# Altium PCB MODULIQ_UART.PcbDoc (part 2 of 2)
Units mm, origin at the board's own origin, x right, y up, seen from the top; angles counter-clockwise.
Board outline 24 x 76.5 mm, 4 copper layers (L1, P2, L3, L4), stack 1.512 mm thick; 76 components, 87 nets, 302 pads, 180 vias.
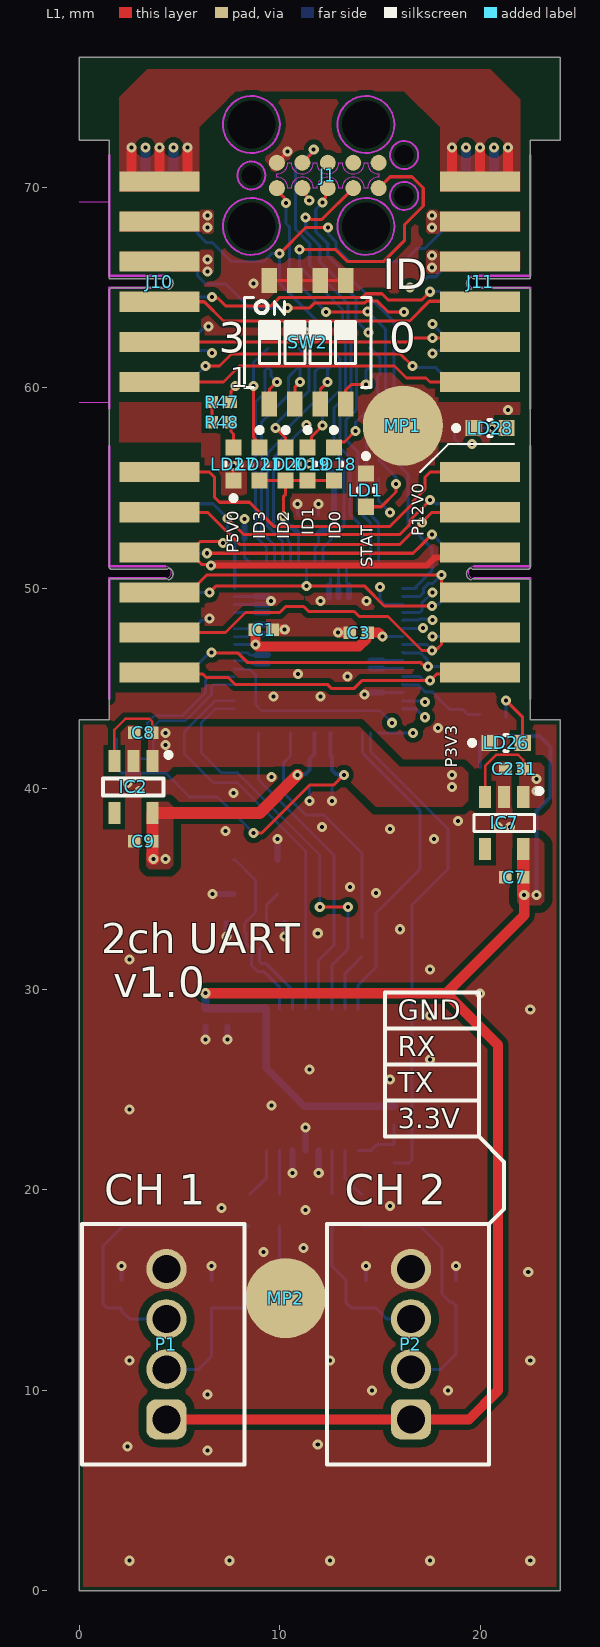
[diagram p0: L1 view]

## Via types
v1: diameter 0.5, hole 0.2, L1 to L4, tented both sides, 179 vias
v2: diameter 0.5, hole 0.2, L1 to L4, 1 vias

## Nets (pads, with @x,y where several pads share a name; then routed paths per layer and width w, separated by ;. In a path a pad name is that pad's centre, name@x,y a point inside that pad or via, vN(x,y) a via of type N, cw(c..) or ccw(c..) an arc to the next point about the centre after c; other vN are vias at no path point) (continued)
TDO: (continued)
  L1 w0.152: v1(12.145,69.246) 12.145,69.34 12.276,69.472 12.276,69.841 J1.3
  L4 w0.152: v1(12.145,69.246) 11.8,68.901 11.8,67.8 12.4,67.2 12.4,66.6 15.7,63.3 15.7,56.4 16.4,55.7 16.4,53.2 17.593,52.007 17.593,50.881 16.814,50.102 16.814,50.024 16.79,50 IC1.17
TMS: IC1.14 J1.5 | length 29.1
  L1 w0.152: v1(11,66.9) 12.8,66.9 13.4,66.3 15.169,66.3 16.219,67.35 16.219,68.13 17.163,69.075 17.163,69.979 16.605,70.537 15.512,70.537 J1.5
  L4 w0.152: v1(11,66.9) 11,66.043 13.133,63.91 13.133,63.076 13.563,62.646 13.563,60.415 13.562,60.414 13.562,59.362 13,58.8 13,57.033 13.5,56.533 13.5,53.7 14.14,53.06 IC1.14
TRG: J4.7 J9.7 | length 19.2
  L1 w0.152: J9.7 6.5,55.8 6.75,55.55 6.75,54.55 7,54.3 8.5,54.3 9.7,53.1 15.5,53.1 16.65,54.25 16.65,54.35 17.25,54.95 17.25,55.55 17.5,55.8 J4.7
UART1_RX: D2.1 P1.3 R8.2 | length 14.1
  L4 w0.15: P1.3 4.345,13.555 2.52,13.555 2.1,13.975 D2.1 1.4,14.1 1.2,14.3 1.2,17.2 2.2,18.2 R8.2
UART1_RX_R: IC3.16 R8.1 | length 2.6
  L4 w0.15: R8.1 8.55,19.8 9,20.25 9.349,20.599 IC3.16
UART1_TX: D3.1 P1.2 R7.2 | length 11.7
  L4 w0.15: P1.2 5.95,11.05 6.6,11.7 D3.1 8.8,14.1 10,15.3 R7.2
UART1_TX_R: IC3.15 R7.1 | length 2.2
  L4 w0.15: R7.1 IC3.15
UART2_RX: D4.1 P2.3 R10.2 | length 7.7
  L4 w0.15: R10.2 12.6,16.2 13.3,15.5 13.3,14.4 13.6,14.1 D4.1 14.8,14.1 15.345,13.555 16.545,13.555 P2.3
UART2_RX_R: IC3.11 R10.1 | length 2.2
  L4 w0.15: R10.1 IC3.11
UART2_TX: D5.1 P2.2 R9.2 | length 12.7
  L4 w0.15: R9.2 17,18.2 18.1,17.1 18.1,14.8 18.5,14.4 18.625,14.4 18.8,14.225 D5.1 18.8,11.8 18.05,11.05 P2.2
UART2_TX_R: IC3.10 R9.1 | length 2.6
  L4 w0.15: IC3.10 13.249,20.601 14.05,19.8 R9.1
pads on no net: IC1.FTG1 IC1.FTG2 IC2.4 IC7.4 J1.6 J1.7 J1.8 J1.Mech

## Polygon pours and split planes (outlines as drawn)
GND on L3 "GND_L03_P028" (solid, remove dead copper, pour order 28): 22.5,60.3 22.5,60.8 22.5,70.3 24,70.3 24,73.4 24,76.5 0,76.5 0,73.4 0,70.3 1.5,70.3 1.5,60.8 1.5,60.3 1.5,55.8 1.5,43.2 0.2,43.2 0.2,0.2 23.8,0.2 23.8,43.2 22.5,43.2 22.5,55.8
P12V0 on L3 "P12V0_L03_P019" (solid, pour order 19): 6.32,66.88 5.9,67.3 5.9,70.8 6.6,71.5 7.3,72.2 16.7,72.2 17.4,71.5 18.2,70.7 18.2,67.7 17.3,66.8 17.3,65.8 17.4,65.7 17.9,65.7 18,65.8 20.6,65.8 21.9,67.1 21.9,74.5 20.2,76.2 3.7,76.2 2.1,74.6 2.1,67.1 3.4,65.8 5,65.8 5.3,65.5 6.6,65.5 6.723,65.623 6.723,66.477
GND on L4 "GND_L04_P029" (solid, remove dead copper, pour order 29): 0.245,72.4 2,72.4 2,69.8 6.1,69.8 6.1,59.2 1.971,59.2 1.971,55.3 6.1,55.3 6.1,43.1 0.245,43.1 0.245,0.1 23.845,0.1 23.845,43.1 18.045,43.1 18.045,55.3 22.045,55.3 22.045,59.2 17.871,59.2 17.871,69.8 22,69.8 22,72.4 23.845,72.4 23.845,73.95 23.845,76.2 0.245,76.2
P5V0 on L4 "P5V0_L04_P027" (solid, pour order 27): 19.2,42.1 19.5,41.8 19.5,40.5 19.6,40.4 20.4,40.4 20.6,40.6 20.6,41.6 20.9,41.9 23,41.9 23.2,41.7 23.2,39.9 22.9,39.6 18.8,39.6 18.1,40.3 18.1,41.8 18.4,42.1
GND on L1 "GND_L01_P030" (solid, remove dead copper, pour order 30): 6.1,44.8 1.521,44.8 1.521,43.2 0.2,43.2 0.2,0.2 23.8,0.2 23.8,43.2 22.5,43.2 22.5,44.8 17.9,44.8 17.9,57.3 22,57.3 22,59.3 17.9,59.3 17.9,72.4 24,72.4 24,73.4 24,76.5 0,76.5 0,73.4 0,72.3 6.1,72.3 6.1,59.3 2,59.3 2,57.3 6.1,57.3
P1V8 on L1 "P1V8_L01_P026" (solid, pour order 26): 3.35,39.35 3.35,36.15 3.5,36 4.5,36 4.7,36.2 4.7,39.1 4.45,39.35
P3V3 on L1 "P3V3_L01_P025" (solid, pour order 25): 21.85,37.55 21.85,34.35 22,34.2 23,34.2 23.2,34.4 23.2,37.3 22.95,37.55
P5V0 on L1 "P5V0_L01_P022" (solid, pour order 22): 22,68.8 17.9,68.8 17.8,68.9 17.4,68.9 17.3,68.8 17.3,67.8 17.4,67.7 17.9,67.7 18,67.8 22,67.8
P5V0 on L1 "P5V0_L01_P021" (solid, pour order 21): 2,67.8 6.1,67.8 6.2,67.7 6.6,67.7 6.7,67.8 6.7,68.8 6.6,68.9 6.1,68.9 6,68.8 2,68.8
P12V0 on L1 "P12V0_L01_P020" (solid, pour order 20): 2,69.8 2,74.5 3.4,75.9 20.5,75.9 22,74.4 22,69.8 18,69.8 18,73 16.2,74.8 7.8,74.8 6,73 6,69.8
P12V0 on L1 "P12V0_L01_P018" (solid, pour order 18): 22,66.8 17.9,66.8 17.8,66.9 17.4,66.9 17.3,66.8 17.3,65.8 17.4,65.7 17.9,65.7 18,65.8 22,65.8
P12V0 on L1 "P12V0_L01_P017" (solid, pour order 17): 2,65.8 6.1,65.8 6.2,65.7 6.6,65.7 6.7,65.8 6.7,66.8 6.6,66.9 6.1,66.9 6,66.8 2,66.8
P5V0 on L1 "P5V0_L01_P015" (solid, pour order 15): 4.7,41.1 12.8,41.1 14.8,39.1 19.1,39.1 19.4,39.4 19.4,40.8 19.1,41.1 16,41.1 13.99,43.11 9.69,43.11 3.34,43.11 3.34,40.86 3.35,40.85 4.45,40.85
P5V0 on L1 "P5V0_L01_P014" (solid, pour order 14): 21.85,39.05 21.84,39.06 21.84,41.31 22.99,41.31 23.2,41.1 23.2,39.3 22.95,39.05
GND on L1 "GND_L01_P013" (solid, pour order 13): 21.56,35.29 21.7,35.43 21.7,37.9 21.8,38 21.8,38.8 21.56,39.04 21.56,41.31 20.94,41.31 20.9,41.27 20.9,39.05 20.6,38.75 20.6,37.9 20.8,37.7 20.8,35.43 20.94,35.29
GND on L1 "GND_L01_P012" (solid, pour order 12): 3.06,37.09 3.2,37.23 3.2,39.7 3.3,39.8 3.3,40.6 3.06,40.84 3.06,43.11 2.44,43.11 2.4,43.07 2.4,40.85 2.1,40.55 2.1,39.7 2.3,39.5 2.3,37.23 2.44,37.09
GND on P2 (split plane): 317 vertices, not listed, extent 0.602,0.602 23.398,75.898

## Keep-outs
KeepOutLayer:
  circle w0.1: c8.59,70.6 r0.7
  circle w0.1: c16.21,69.584 r0.7
  circle w0.1: c16.21,71.616 r0.7
  circle w0.1: c14.305,68.06 r1.421
  circle w0.1: c8.59,68.06 r1.421
  circle w0.1: c14.305,73.14 r1.421
  circle w0.1: c8.59,73.14 r1.421
  lines w0.05: 0,59.3 1.503,59.3 1.503,65 ; 0.9,69.3 0,69.3 ; 1.5,65.6 1.5,68.4 ; 1.5,69.3 0,69.3 ; 0,69.3 0,69.3

## Other copper
L4:
  pour cut-out: 12.363,37.861 12.363,31.376 10.987,30 7,30 6,31 6,37.5 7,38.5 11.724,38.5

## Silkscreen, mask and mechanical layers (free items; w line width, h text height)
TopOverlay:
  lines w0.1: 17,55.8 18.4,57.2 21.7,57.2
  lines w0.2: 18.45,22.65 19.95,22.65 ; 18.45,24.45 19.95,24.45 ; 18.45,26.25 19.95,26.25 ; 18.45,28.05 19.95,28.05 ; 18.45,29.85 19.95,29.85 19.95,28.05 ; 18.75,22.65 15.25,22.65 15.25,24.45 ; 18.75,24.45 15.25,24.45 ; 18.75,26.25 15.25,26.25 ; 18.75,28.05 15.25,28.05 ; 18.75,29.85 15.25,29.85 15.25,28.05 ; 20.45,18.3 21.2,19.05 21.2,21.4 19.95,22.65 ; 15.25,24.45 15.25,26.25 ; 15.25,26.25 15.25,28.05 ; 19.95,22.65 19.95,24.45 ; 19.95,24.45 19.95,26.25 ; 19.95,26.25 19.95,28.05
  text "ID" at 15.137,64.922 h1.52
  text "3" at 6.954,61.754 h1.52
  text "0" at 15.454,61.754 h1.52
  text "ID1" at 11.7,52.65 h0.6 r90
  text "P12V0" at 17.193,52.593 h0.6 r90
  text "ID3" at 9.29,52.45 h0.6 r90
  text "ID2" at 10.49,52.45 h0.6 r90
  text "ID0" at 13.055,52.45 h0.6 r90
  text "P5V0" at 7.95,51.75 h0.6 r90
  text "STAT" at 14.655,51.05 h0.6 r90
  text "P3V3" at 18.85,41.05 h0.6 r90
  text "2ch UART" at 1.1,31.8 h1.5
  text "v1.0" at 1.7,29.6 h1.52
  text "GND" at 15.895,28.476 h1
  text "RX" at 15.895,26.676 h1
  text "TX" at 15.895,24.876 h1
  text "3.3V" at 15.895,23.076 h1
  text "CH 1" at 1.254,19.254 h1.52
  text "CH 2" at 13.254,19.254 h1.52
Mechanical1:
  the board outline again, w0.15

## Text inside footprints (layer, text, board x,y; h text height)
SW2: TopOverlay "1" at 7.523,60.025 h1